# Altium PCB urbanturbine_rev6.PcbDoc
Units mm, origin at the board's own origin, x right, y up, seen from the top; angles counter-clockwise.
Board outline 100 x 100 mm, 2 copper layers (Top Layer, Bottom Layer); 61 components, 55 nets, 234 pads, 58 vias.
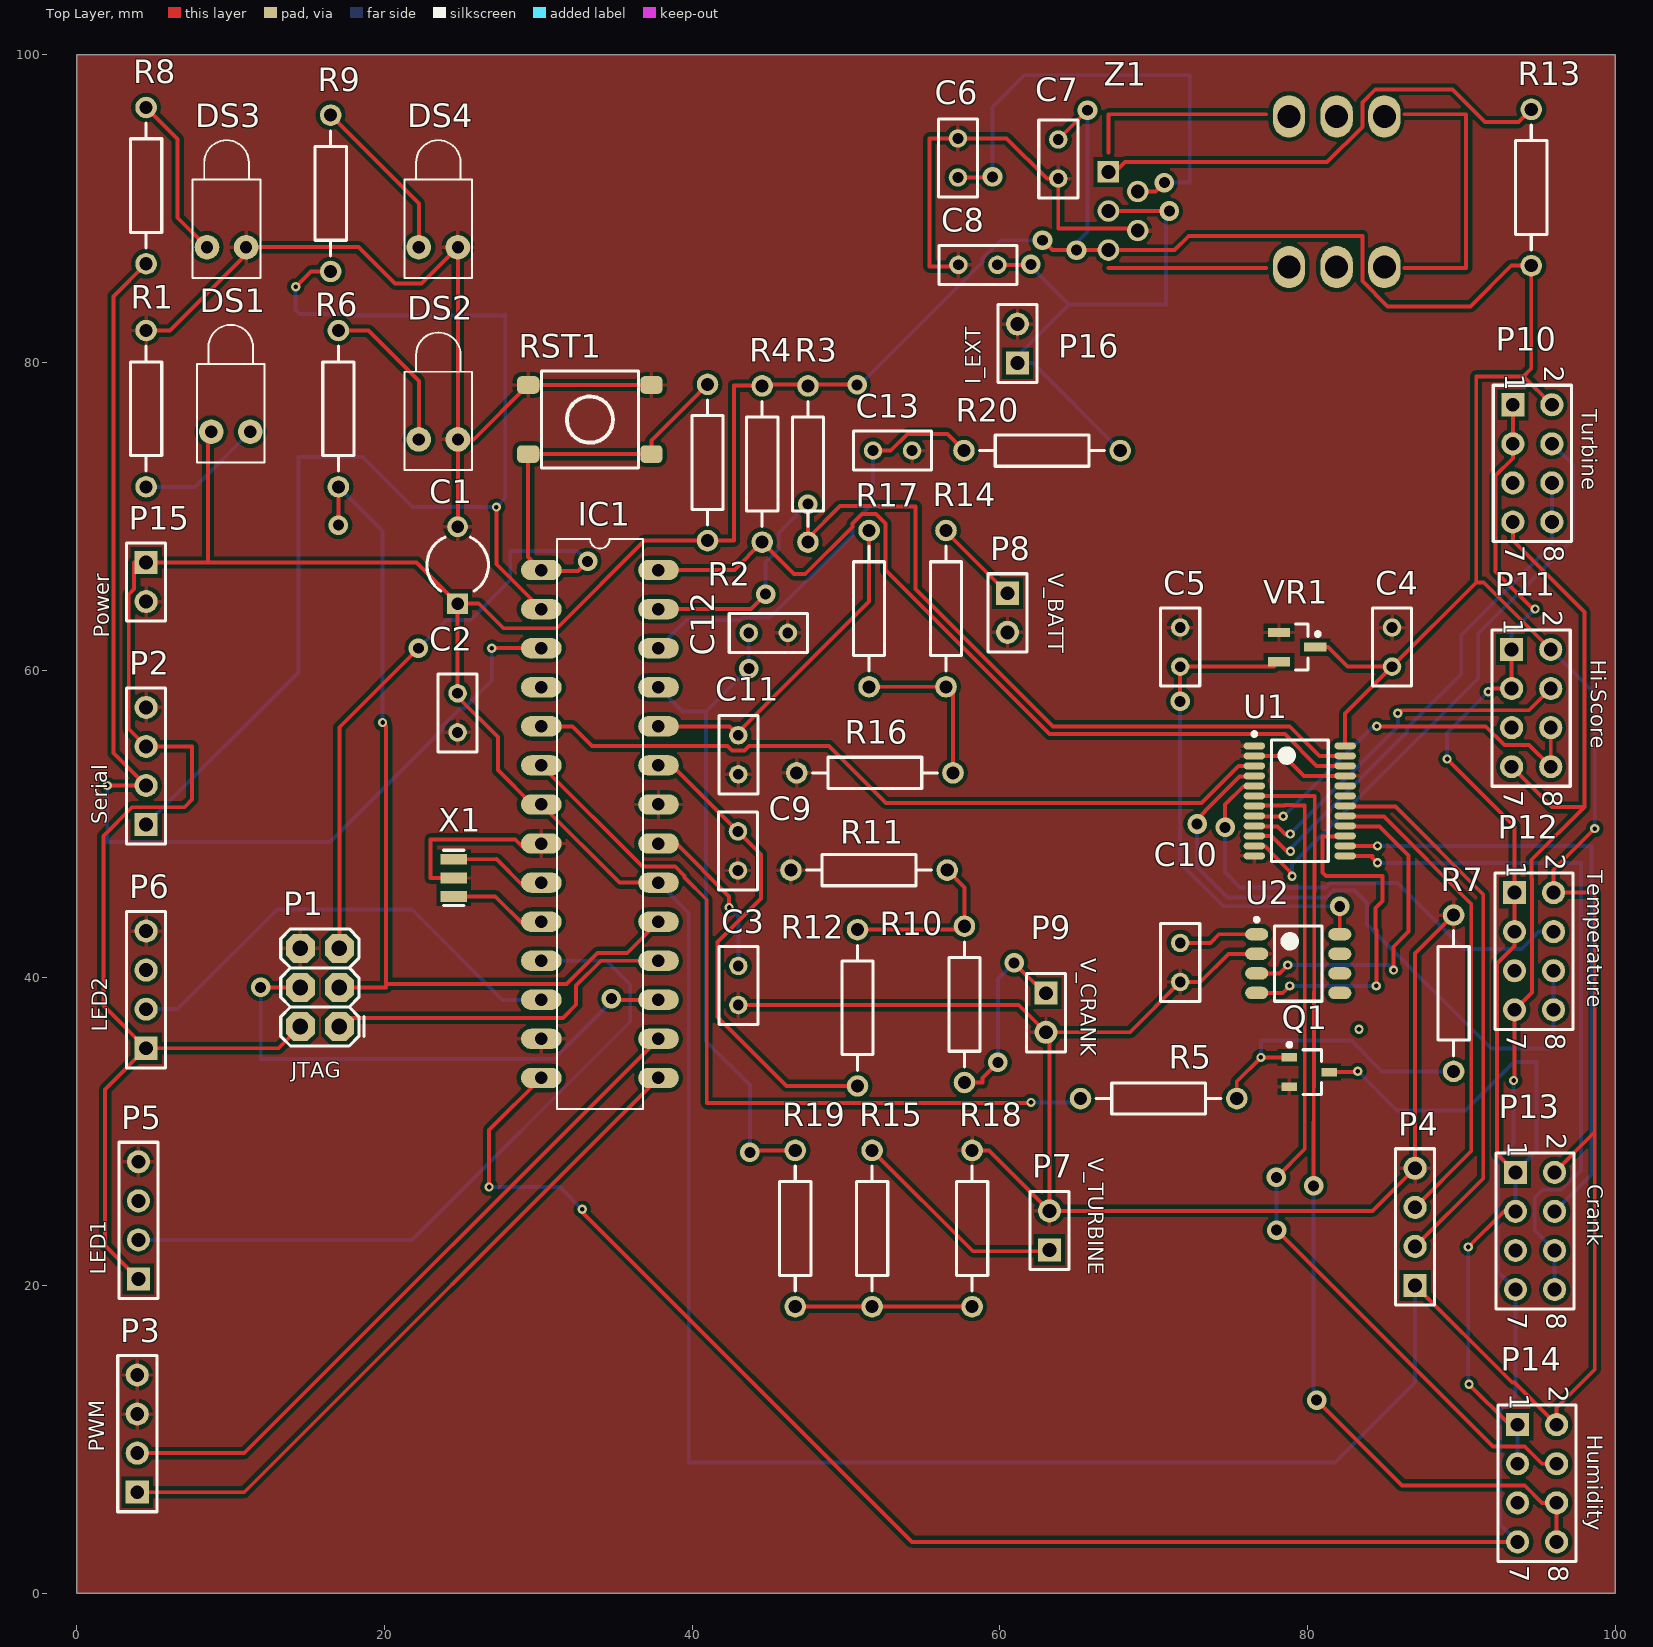
[diagram p0: Top Layer view]
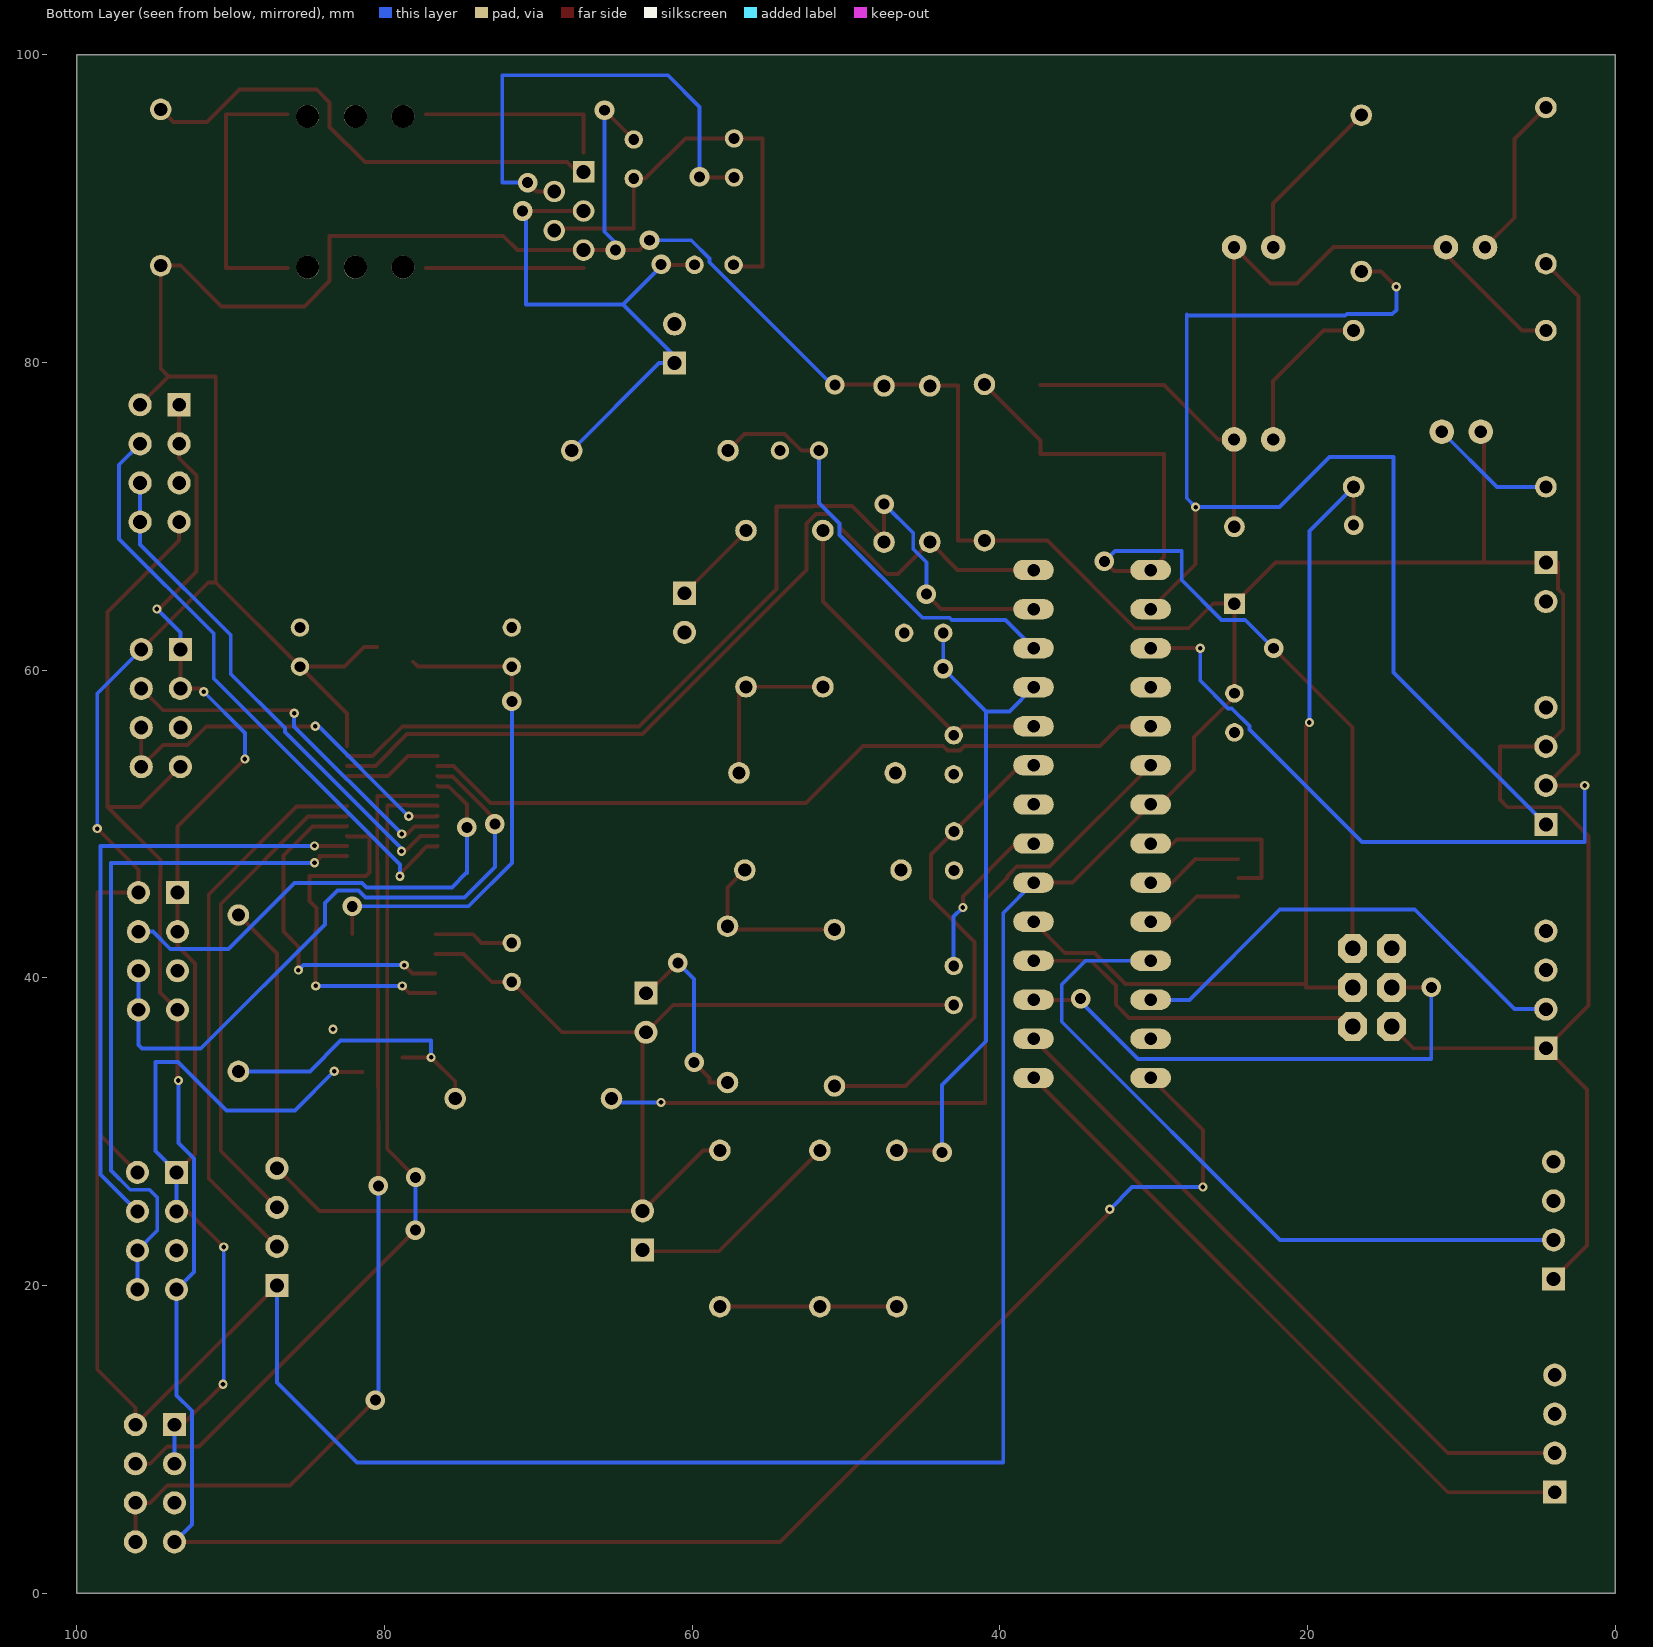
[diagram p1: Bottom Layer view, seen from below]

## Layer stack, top to bottom
Top Solder: solder mask 0.0102, Solder Resist, Dk 3.5
Top Layer: signal copper 0.0356
Dielectric 1: dielectric 0.32, FR-4, Dk 4.8
Bottom Layer: signal copper 0.0356
Bottom Solder: solder mask 0.0102, Solder Resist, Dk 3.5

## Board outline
0,0 0,100 100,100 100,0 0,0

## Design rules (kind name [scope] priority, off if disabled: settings)
Clearance [All] p1: gap=0.254
PolygonConnect [All] p1: connectstyle=Relief reliefconductorwidth=0.254 reliefentries=4 polygonreliefangle="90 Angle" airgapwidth=0.254
RoutingVias [All] p1: holewidth=0.711 width=1.27 viastyle="Through Hole" minholewidth=0.711 minwidth=1.27 maxholewidth=0.711 maxwidth=1.27
SilkToSolderMaskClearance [IsPad] p1: minsilkscreentomaskgap=0.1 clearancetoexposedcopper=TRUE
SolderMaskExpansion [All] p1: expansion=0.102
Width [All] p1: maxlimit=0.254 minlimit=0.254 preferedwidth=0.254
29 further rules are at their usual default settings.

## Classes and differential pairs
component class displays: P10 P11 P12 P13 P14
component class sensors: C6 C7 C8 C9 C10 C11 C12 C13 P7 P8 P9 P16 R10 R11 R12 R13 R14 R15 R16 R17 R18 R19 U2 Z1
component class urbanturbine: C1 C2 C3 C4 C5 DS1 DS2 DS3 DS4 IC1 P1 P2 P3 P4 P5 P6 P15 Q1 R1 R2 R3 R5 R6 R7 R8 R9 RST1 U1 VR1 X1

## Components (designator, comment, footprint, x,y, rotation, side; value= is the part's Value field where it differs from the comment)
C1 "Cap2" CAPR5-4X5 24.75,66.825 r90 top
C2 "0.1uF" RAD-0.1 24.75,57.225 r90 top
C3 "C1005X7R1H104K050BB" RAD-0.1 43,39.5 r270 top
C4 "Cap" RAD-0.1 85.5,61.5 r270 top
C5 "Cap" RAD-0.1 71.725,61.5 r270 top
C6 "Cap" RAD-0.1 57.275,93.3 r90 top
C7 "Cap" RAD-0.1 63.8,93.23 r90 top
C8 "Cap" RAD-0.1 58.575,86.35 r180 top
C9 "Cap" RAD-0.1 42.975,48.25 r90 top
C10 "p" RAD-0.1 71.725,41 r90 top
C11 "Cap" RAD-0.1 43,54.5 r90 top
C12 "Cap" RAD-0.1 44.95,62.425 r180 top
C13 "Cap" RAD-0.1 53.025,74.275 r180 top
DS1 "LTST-C191KGKT" LED-1 10,75.5 r90 top
DS2 "LTST-C191KRKT" LED-1 23.5,75 r90 top
DS3 "LTST-C191KRKT" LED-1 9.73,87.5 r90 top
DS4 "LTST-C191KRKT" LED-1 23.5,87.5 r90 top
IC1 "ATMEGA328-PU" *DIL28 34,50 r0 top
P1 "M20-9980346" 2X3 17.065,36.835 r90 top
P2 "Header 4" HDR1X4 4.5,49.96 r90 top
P3 "" HDR1X4 3.925,6.56 r90 top
P4 "" HDR1X4 87,20 r90 top
P5 "" HDR1X4 4,20.42 r90 top
P6 "" HDR1X4 4.5,35.42 r90 top
P7 "" HDR1X2 63.225,22.31 r90 top
P8 "" HDR1X2 60.5,65 r270 top
P9 "" HDR1X2 63,39 r270 top
P10 "" HDR2X4 93.35,77.255 r270 top
P11 "SPEED_DISP" HDR2X4 93.275,61.345 r270 top
P12 "TEMP_DISP" HDR2X4 93.46,45.54 r270 top
P13 "CRANK_DISP" HDR2X4 93.525,27.355 r270 top
P14 "HUMIDITY_DISP" HDR2X4 93.66,10.95 r270 top
P15 "" HDR1X2 4.5,67 r270 top
P16 "" HDR1X2 61.15,79.96 r90 top
Q1 "MOSFET N" SOT23127P600-8N 80.125,33.875 r0 top
R1 "RC0603JR-071KL" AXIAL-0.4 4.5,77 r90 top
R2 "Res1" AXIAL-0.4 41,73.5 r90 top
R3 "Res2" AXIAL-0.4 47.525,73.4 r90 top
R4 "Res2" AXIAL-0.4 44.55,73.4 r90 top
R5 "ERJ-3EKF1002V" AXIAL-0.4 70.325,32.15 r180 top
R6 "Res1" AXIAL-0.4 17,77 r90 top
R7 "Res2" AXIAL-0.4 89.5,39 r90 top
R8 "Res1" AXIAL-0.4 4.5,91.5 r90 top
R9 "Res1" AXIAL-0.4 16.5,91 r90 top
R10 "Res2" AXIAL-0.4 57.7,38.275 r270 top
R11 "Res2" AXIAL-0.4 51.5,47 r180 top
R12 "Res2" AXIAL-0.4 50.75,38.05 r90 top
R13 "Res2" AXIAL-0.4 94.55,91.375 r270 top
R14 "Res2" AXIAL-0.4 56.5,64 r90 top
R15 "Res2" AXIAL-0.4 51.7,23.7 r90 top
R16 "Res2" AXIAL-0.4 51.875,53.325 r180 top
R17 "Res2" AXIAL-0.4 51.5,64 r270 top
R18 "Res2" AXIAL-0.4 58.2,23.7 r90 top
R19 "Res2" AXIAL-0.4 46.7,23.7 r270 top
R20 "Res2" AXIAL-0.4 62.75,74.275 r0 top
RST1 "PTS645SH50SMTR92 LFS" "TACTILE SWITCH SMD" 33.35,76.29 r180 top
U1 "TCA9548A" TCA9548A 79.5,51.5 r0 top
U2 "HIH6030" HIH6300 79.4,40.925 r0 top
VR1 "AP2138N-3.3TRG1" SOT23_M 79.325,61.5 r0 top
X1 "16MHz" RESONATOR-SMD 24.5,46.5 r90 top
Z1 "LEM HO-25P" HO-25 67.06,93.64 r0 top

## Footprints (in the part's own frame and the unit in brackets; to place one, negate y for a bottom-side part, rotate by r counter-clockwise, add the part's x,y. Pads: shape width x height; smd on the part's side, far side on the other; paste and mask are expansions set on the pad)
2X3 [mil] "2X3"
  oct 74x74 hole 40: 1(0,0) 2(0,100) 3(100,0) 4(100,100) 5(200,0) 6(200,100)
  silkscreen extent -50,-63 250,150, body extent -50,-49 250,149, height 335
*DIL28 [mil]
  oval 104x52 hole 32: 1(-150,650) 2(-150,550) 3(-150,450) 4(-150,350) 5(-150,250) 6(-150,150) 7(-150,50) 8(-150,-50) 9(-150,-150) 10(-150,-250) 11(-150,-350) 12(-150,-450) 13(-150,-550) 14(-150,-650) 15(150,-650) 16(150,-550) 17(150,-450) 18(150,-350) 19(150,-250) 20(150,-150) 21(150,-50) 22(150,50) 23(150,150) 24(150,250) 25(150,350) 26(150,450) 27(150,550) 28(150,650)
  silkscreen extent -110,-730 110,730, body extent -315,-730 110,730, height 314
AXIAL-0.4 [mm] "Axial Device, Thru-Hole; 2 Leads; 0.4 in Pin Spacing"
  round 1.4 hole 0.85: 1(-5.08,0) 2(5.08,0)
  silkscreen extent -4.06,-1.02 4.06,1.02
CAPR5-4X5 [mm] "Capacitor; 2 Leads"
  rect 1.35x1.35 hole 0.8: 1(-2.5,0)
  round 1.35 hole 0.8: 2(2.5,0)
  silkscreen extent -1.69,-2 1.82,2
HDR1X2 [mm] "Connector; Header; 2 Position"
  rect 1.5x1.5 hole 0.9: 1(0,0)
  round 1.5 hole 0.9: 2(2.54,0)
  silkscreen extent -1.27,-1.27 3.81,1.27
HDR1X4 [mm] "Connector; Header; 4 Position"
  rect 1.5x1.5 hole 0.9: 1(0,0)
  round 1.5 hole 0.9: 2(2.54,0) 3(5.08,0) 4(7.62,0)
  silkscreen extent -1.27,-1.27 8.89,1.27
HDR2X4 [mm] "Connector; Header; 4x2 Position"
  rect 1.5x1.5 hole 0.9: 1(0,0)
  round 1.5 hole 0.9: 2(0,2.54) 3(2.54,0) 4(2.54,2.54) 5(5.08,0) 6(5.08,2.54) 7(7.62,0) 8(7.62,2.54)
  silkscreen extent -1.27,-1.27 8.89,3.81
HIH6300 [mm] "Temp/Humidity sensor"
  oval 1.5x0.8 smd: 1(-2.7,1.905) 2(-2.7,0.635) 3(-2.7,-0.635) 4(-2.7,-1.905) 5(2.7,-1.905) 6(2.7,-0.635) 7(2.7,0.635) 8(2.7,1.905)
  silkscreen extent -2.82,-2.45 1.55,2.98, body extent -1.95,-2.45 1.95,2.45, height 1.91
HO-25 [mm]
  round 1.4 / inner oval 2.5x1.4 / far side round 1.4 hole 0.9: 1(0,-6.33) 2(1.905,-5.06) 3(0,-3.79) 4(1.905,-2.52)
  rect 1.4x1.4 / inner rect 2.5x1.4 / far side rect 1.4x1.4 hole 0.9: 5(0,-1.25)
  oval 2.1x2.74 / inner round 1.5 / far side round 1.5 hole 1.5: ""(11.74,-7.44) ""(11.74,2.36) ""(14.84,-7.44) ""(14.84,2.36) ""(17.94,-7.44) ""(17.94,2.36)
  Top Layer lines w0.254: 0,-7.5 10.25,-7.5 ; 0,0 0,2.5 10.25,2.5 ; 19.25,-7.5 23.25,-7.5 23.25,2.5 19.25,2.5
  body extent -0.22,-8.5 23.72,3.5, height 20.8
LED-1 [mm] "LED; 2 Leads"
  round 1.6 hole 0.8: 1(0,1.27) 2(0,-1.27)
  silkscreen extent -2,-2.2 6.95,2.2
RAD-0.1 [mm] "Radial Cap, Thru-Hole; 2 Leads; 0.1 in Pin Spacing"
  round 1.2 hole 0.7: 1(-1.27,0) 2(1.27,0)
  silkscreen extent -2.54,-1.27 2.54,1.27
RESONATOR-SMD [mil] "RESONATOR-SMD"
  rect 28x67 smd: 1(-47.62,0) 2(-0.38,0) 3(47.62,0)
  silkscreen extent -71,-26 71,26
SOT23_M [mm] "SOT23, 3-Leads, Body 2.9x1.3mm, Pitch 0.95mm, Lead Span 2.3mm - Reverse Pinning, IPC Low Density"
  rect 1.45x0.6 smd: 1(1.175,0) 2(-1.175,-0.95) 3(-1.175,0.95)
  silkscreen extent -0.1,-1.5 1.48,1.5, body extent -0.7,-1.5 0.7,1.5, height 1.1
SOT23127P600-8N [mm]
  rect 1x0.55 smd: 1(-1.3,0.95) 2(-1.3,-0.95) 3(1.3,0)
  silkscreen extent -1.42,-1.45 0.8,1.9, body extent -0.8,-1.45 0.8,1.45, height 1.25
"TACTILE SWITCH SMD" [mm] "Switch, Through-Hole, 4 Leads, Body 8.5x8.5mm, Row Spacing 9.0mm, Pitch 4.5mm"
  rrect50% 1.448x1.143 smd: 1(4.01,-2.25) 2(-4,-2.25) 3(4.01,2.24) 4(-4,2.24)
  silkscreen extent -3.16,-3.16 3.15,3.15, body extent -4.5,-3.1 4.5,3.1, height 4.5
TCA9548A [mm] "TSOP, 24-Leads, Body 7.80x4.40mm, Pitch 0.65mm, IPC Medium Density"
  oval 1.4x0.45 smd: 1(-2.95,3.575) 2(-2.95,2.925) 3(-2.95,2.275) 4(-2.95,1.625) 5(-2.95,0.975) 6(-2.95,0.325) 7(-2.95,-0.325) 8(-2.95,-0.975) 9(-2.95,-1.625) 10(-2.95,-2.275) 11(-2.95,-2.925) 12(-2.95,-3.575) 13(2.95,-3.575) 14(2.95,-2.925) 15(2.95,-2.275) 16(2.95,-1.625) 17(2.95,-0.975) 18(2.95,-0.325) 19(2.95,0.325) 20(2.95,0.975) 21(2.95,1.625) 22(2.95,2.275) 23(2.95,2.925) 24(2.95,3.575)
  silkscreen extent -3.07,-3.95 1.85,4.47, body extent -3.27,-3.96 3.28,3.93, height 1.2

## Part data
C1 C4 C5 C6 C7 C8 C9 C11 C12 C13: "Capacitor"
C2 C3 C10: library part Cap, "Capacitor"
DS1 DS2 DS3 DS4: library part LED1, "Typical RED GaAs LED"
IC1: "IC MCU 8BIT 32KB FLASH 28DIP"
P1: "DIL VERTICAL PC TAIL PIN HEADER"
P2: "Header, 4-Pin"
P3 P4 P5 P6: library part "Header 4", "Header, 4-Pin"
P7 P8 P9 P15 P16: library part "Header 2", "Header, 2-Pin"
P10 P11 P12 P13 P14: library part "Header 4X2", "Header, 4-Pin, Dual row"
Q1: "N-channel MOSFET"
R1 R2 R5 R6 R8 R9: library part Res2, "Resistor"
R3 R4 R7 R10 R11 R12 R13 R14 R15 R16 R17 R18 R19 R20: "Resistor"
RST1: "SWITCH TACTILE SPST-NO 0.05A 12V"
U1: "IIC multiplexor"
U2: "Temp/Humidity Sensor"
VR1: "IC REG LINEAR 3.3V 250MA SOT23-3"
X1: library part CSTNE16M0VH3C000R0, "CER RESONATOR 16MHZ SMD"
Z1: "Hall Effect Current Sensor"

## Via types
v1: diameter 0.6, hole 0.3, Top Layer to Bottom Layer, 31 vias
v2: diameter 1.27, hole 0.711, Top Layer to Bottom Layer, 26 vias
v3: diameter 1.27, hole 0.711, Top Layer to Bottom Layer, tented both sides, 1 vias

## Nets (pads, with @x,y where several pads share a name; then routed paths per layer and width w, separated by ;. In a path a pad name is that pad's centre, name@x,y a point inside that pad or via, vN(x,y) a via of type N, cw(c..) or ccw(c..) an arc to the next point about the centre after c; other vN are vias at no path point)
3.3V: C5.2 U2.8 VR1.2 | length 32.7
  Top Layer w0.254: v2(71.725,57.975) C5.2 77.83,60.23 VR1.2 ; U2.8 v2(82.1,44.65)
  Bottom Layer w0.254: v2(71.725,57.975) 71.725,47.475 74.55,44.65 v2(82.1,44.65)
+5: C1.1 C2.2 C4.2 C7.2 DS1.1 IC1.7 IC1.20 P1.2 P2.3 P4.1 P5.1 P6.1 P10.2 P11.2 P12.2 P13.2 P14.2 P15.1 R2.1 R3.2 R4.2 R13.2 U1.24 VR1.1 Z1.1 | length 449.2
  Top Layer w0.254: P5.1 1.83,22.59 1.83,32.75 P6.1 ; DS1.1 8.525,75.295 8.525,67 ; P1.2 13.11,35.42 P6.1 ; IC1.20 35.27,46.19 IC1.7 29.605,51.27 27.375,53.5 27.375,55.65 24.75,58.275 C2.2 C1.1 ; v2(50.725,78.55) 50.695,78.58 44.5,78.58 44.425,78.505 42.72,78.505 42.72,68.42 R2.1 36.895,68.42 31.2,62.725 27.725,62.725 26.125,64.325 C1.1 ; v2(62.775,87.95) 63.415,87.31 v2(64.985,87.31) Z1.1 71.36,87.31 72.281,88.231 83.569,88.231 83.569,85.287 85.206,83.65 90.6,83.65 93.245,86.295 R13.2 94.55,79.6 94.048,79.097 ; C7.2@63.8,94.7 C7.2 v2(65.7,96.4) v2@65.7,96.525 ; VR1.1 81.325,61.5 82.595,60.23 C4.2 ; U1.24 82.45,57.18 C4.2 ; P4.1 93.31,13.69 93.46,13.69 P14.2 96.2,12.05 98.675,14.525 98.675,29.965 ; P11.2 91.458,65.702 90.972,65.702 ; P10.2 94.048,79.097 ; P13.2 98.675,29.965 ; v1(98.675,49.7) 96,47.025 P12.2 98.675,45.54 98.675,29.965 ; P6.1 1.725,38.195 1.725,49.224 3.592,51.091 6.991,51.091 7.49,51.59 7.49,55.04 P2.3 3.369,56.171 3.369,64.928 3.725,65.284 3.725,67 P15.1 8.525,67 ; 8.525,67 22.075,67 C1.1 ; C4.2 90.972,65.702 ; 90.972,65.702 90.972,79.097 94.048,79.097
  Bottom Layer w0.254: IC1.20 39.775,44.225 39.775,8.5 81.8,8.5 87,13.7 P4.1 ; v2(50.725,78.55) 50.892,78.55 58.864,86.522 58.864,86.756 60.058,87.95 v2(62.775,87.95) ; v2(64.985,87.31) 64.985,87.785 65.7,88.5 v2(65.7,96.4) ; P11.2 98.675,58.485 v1(98.675,49.7)
BATTERY_IN_+: P8.1 R14.2 | length 5.7
  Top Layer w0.254: R14.2 56.5,69 P8.1
BATTERY_VOLTAGE: C11.2 IC1.24 R17.1 | length 22.3
  Top Layer w0.254: IC1.24 42.42,56.35 C11.2 43,55.975 51.5,64.475 R17.1
BYTE_ADDR_LED1: IC1.11 P5.2 | length 46.7
  Bottom Layer w0.254: P5.2 21.793,22.96 35.975,37.142 35.975,39.575 34.44,41.11 IC1.11
BYTE_ADDR_LED2: IC1.12 P6.2 | length 30.8
  Bottom Layer w0.254: P6.2 6.535,37.96 13.025,44.45 21.8,44.45 27.68,38.57 IC1.12
CRANK_C: P13.4 U1.14 | length 40.8
  Top Layer w0.254: U1.14 v1(84.55,48.575)
  Bottom Layer w0.254: v1(84.55,48.575) 98.475,48.575 98.475,27.225 P13.4
CRANK_D: P13.6 P13.8 U1.13 | length 46
  Top Layer w0.254: U1.13 84.225,47.925 84.225,47.8 v1(84.55,47.475) v1@84.55,47.6
  Bottom Layer w0.254: v1(84.55,47.475) 97.775,47.475 97.775,27.466 96.533,26.224 95.274,26.224 94.775,25.725 94.775,23.565 P13.6 P13.8
CRANK_IN_+: P9.1 R10.2 | length 13
  Top Layer w0.254: R10.2 58.87,33.195 58.87,33.495 v2(59.875,34.5) ; v2(60.925,40.975) 62.9,39 P9.1 P9.1@63,39.325
  Bottom Layer w0.254: v2(59.875,34.5) 59.875,39.925 v2(60.925,40.975)
CRANK_VOLTAGE: C9.2 IC1.23 R12.1 | length 31.8
  Top Layer w0.254: IC1.23 38.685,53.81 C9.2 44.475,48.02 44.475,45.15 41.65,42.325 41.65,37.45 46.13,32.97 R12.1
DISPLAY_GND: P10.1 P10.3 P11.1 P11.3 P12.1 P12.3 P13.1 P13.3 P14.1 P14.3 Q1.3 | length 103.4
  Top Layer w0.254: Q1.3 83.225,33.875 v1(83.275,33.925) ; v1(89.075,54.225) 93.46,49.84 P12.1 P12.3 93.46,42.059 92.329,40.928 92.329,28.551 P13.1 ; v1(90.45,22.5) 92.765,24.815 P13.3 ; v1(90.5,13.575) 93.125,10.95 P14.1 ; v1(91.75,58.6) 91.955,58.805 P11.3 P11.1 ; P10.1 P10.3 93.35,73.774 92.219,72.643 92.219,66.406 94.65,63.975 v1(94.8,63.975)
  Bottom Layer w0.254: v1(83.275,33.925) 85.825,31.375 90.275,31.375 93.425,34.525 94.9,34.525 94.9,28.73 P13.1 P13.3 ; v1(89.075,54.225) 89.075,55.925 v1(91.75,58.6) ; v1(90.45,22.5) 90.45,13.625 v1(90.5,13.575) ; P11.1 93.275,62.45 v1(94.8,63.975) ; P14.3 P14.1
DISPLAY_RES: IC1.14 P10.7 P11.7 P12.7 P13.7 P14.7 | length 162.7
  Top Layer w0.254: v1(26.8,26.4) 26.8,30.1 IC1.14 ; v1(32.85,24.95) 32.85,24.775 54.295,3.33 P14.7 ; P11.7 95.9,51.1 98,51.1 ; P10.7 93.35,68.425 98,63.775 98,51.1 ; v1(93.4,33.325) 93.46,33.385 P12.7 94.591,39.051 94.591,46.448 94.575,46.464 94.575,47.675 98,51.1
  Bottom Layer w0.254: v1(26.8,26.4) 31.4,26.4 v1(32.85,24.95) ; v1(93.4,33.325) 93.4,29.269 92.394,28.263 92.394,20.866 P13.7 93.525,12.854 92.529,11.858 92.529,4.461 P14.7
DISPLAY_TOGGLE: IC1.6 R5.2 | length 52.1
  Top Layer w0.254: IC1.6 36.769,47.231 38.902,47.231 39.512,46.621 39.512,46.513 40.95,45.075 40.95,31.85 61.975,31.85 v1(62.025,31.9)
  Bottom Layer w0.254: v1(62.025,31.9) 64.995,31.9 R5.2
ENV_C: U1.16 U2.3 | length 22
  Top Layer w0.254: U2.3 78.19,40.29 v1(78.725,40.825) ; U1.16 82.494,49.831 84.694,49.831 86.581,47.944 86.581,42.999 85.6,42.018 v1(85.6,40.5)
  Bottom Layer w0.254: v1(78.725,40.825) 85.275,40.825 v1(85.6,40.5)
ENV_D: U1.15 U2.4 | length 23.1
  Top Layer w0.254: U2.4 78.395,39.02 v1(78.85,39.475) ; U1.15 82.406,49.181 80.983,49.181 80.983,46.85 81.208,46.625 84.875,46.625 84.875,44.984 84.419,44.528 84.419,43.176 84.475,43.12 v1(84.475,39.475)
  Bottom Layer w0.254: v1(78.85,39.475) v1(84.475,39.475)
GND: C1.2 C2.1 C3.2 C4.1 C5.1 C6.2 C7.1 C8.2 C9.1 C10.1 C11.1 C12.1 C13.1 DS2.2 DS3.2 DS4.2 IC1.8 IC1.13 IC1.22 P1.6 P2.4 P3.3 P3.4 P4.4 P5.4 P6.4 P7.2 P8.2 P9.2 P15.2 P16.2 Q1.2 R1.2 R7.2 R11.2 R16.2 R18.2 RST1.1 RST1.2 U1.1 U1.2 U1.12 U1.21 U2.2 VR1.3 X1.2 Z1.2 | length 201.2
  Top Layer w0.254: R1.2 6.045,82.08 11,87.035 DS3.2 18.3,87.5 20.675,85.125 22.395,85.125 DS4.2 DS2.2 ; X1.2@24.5,46.5 23,46.5 23,49 28.5,49 29.04,48.46 IC1.8@31,48.46 ; C1.2 24.77,69.345 DS2.2 ; RST1.2 RST1.1 25.8,75 DS2.2 ; C3.2 61.23,38.23 P9.2 ; C8.2 57.185,86.23 55.42,86.23 55.42,94.57 C6.2 60.445,94.57 63.055,91.96 C7.1 63.8,88.725 68.82,88.725 Z1.2 ; R18.2 59.295,28.78 P7.2 ; U1.2 78.475,54.425 79.775,53.125 U1.21 ; U2.2 74.86,41.56 73.03,39.73 C10.1 68.455,36.46 P9.2 ; R7.2 87,41.58 P4.4 84.23,24.85 P7.2 ; P9.2 63.225,36.235 P7.2
HI_SCORE_C: P11.4 U1.9 | length 23.6
  Top Layer w0.254: U1.9 76.594,49.831 78.051,49.831 78.14,49.742 78.151,49.742 78.568,49.325 ; v1(85.875,57.2) 86.071,57.396 94.406,57.396 P11.4
  Bottom Layer w0.254: v1(78.875,49.35) 85.875,56.35 v1(85.875,57.2)
HI_SCORE_D: P11.6 P11.8 U1.8 | length 25.7
  Top Layer w0.254: U1.8 76.575,50.55 76.625,50.5 v1(78.425,50.5) ; v1(84.5,56.35) 91.591,56.35 92.807,55.134 94.406,55.134 P11.8 P11.6
  Bottom Layer w0.254: v1(78.425,50.5) 84.5,56.575 v1(84.5,56.35)
HUMIDITY_C: P14.4 U1.7 | length 56.2
  Top Layer w0.254: U1.7 76.581,51.206 78.518,51.206 78.543,51.231 79.107,51.231 79.132,51.206 79.825,51.206 79.825,28.875 v2(77.975,27.025) ; v2(78,23.6) 92.059,9.541 94.128,9.541 95.259,8.41 P14.4
  Bottom Layer w0.254: v2(77.975,27.025) 77.975,23.625 v2(78,23.6)
HUMIDITY_D: P14.6 P14.8 U1.6 | length 64.2
  Top Layer w0.254: U1.6 80.475,51.825 v2(80.4,26.475) ; v2(80.6,12.55) 86.149,7.001 94.128,7.001 95.259,5.87 P14.6 P14.8
  Bottom Layer w0.254: v2(80.4,26.475) 80.4,12.75 v2(80.6,12.55)
MISO: IC1.18 P1.1 | length 23.6
  Top Layer w0.254: P1.1 17.065,37.4 31.6,37.4 32.45,38.25 32.45,39.5 34.06,41.11 IC1.18
MOSI: IC1.17 P1.4 | length 34.9
  Top Layer w0.254: v2(11.95,39.375) P1.4 ; v2(34.75,38.65) 34.83,38.57 IC1.17
  Bottom Layer w0.254: v2(11.95,39.375) 11.95,34.725 31.018,34.725 34.75,38.457 v2(34.75,38.65)
MUX_RST: IC1.5 U1.3 | length 49.7
  Top Layer w0.254: IC1.5 32.225,56.35 33.5,55.075 42.308,55.075 42.594,54.789 43.406,54.789 43.692,55.075 48.9,55.075 52.6,51.375 73.113,51.375 75.513,53.775 U1.3
NetC3_1: C3.1 IC1.21 | length 10.8
  Top Layer w0.254: IC1.21 38.97,48.73 42.4,45.3 v1(42.4,44.575)
  Bottom Layer w0.254: v1(42.4,44.575) 43,43.975 C3.1
NetC6_1: C6.1 Z1.4 | length 31.1
  Top Layer w0.254: C6.1 59.48,92.03 v2(59.525,92.075) ; Z1.4 70.12,91.12 v2(70.7,91.7)
  Bottom Layer w0.254: v2(59.525,92.075) 59.525,96.625 61.575,98.675 72.35,98.675 72.35,91.7 v2(70.7,91.7)
NetC10_2: C10.2 U2.1 | length 5.2
  Top Layer w0.254: C10.2 73.695,42.27 74.255,42.83 U2.1
NetDS1_2: DS1.2 R1.1 | length 8.3
  Bottom Layer w0.254: R1.1 7.69,71.92 DS1.2
NetDS2_1: DS2.1 R6.2 | length 10.4
  Top Layer w0.254: R6.2 18.945,82.08 22.23,78.795 DS2.1
NetDS3_1: DS3.1 R8.2 | length 10.7
  Top Layer w0.254: R8.2 6.55,94.53 6.55,89.41 DS3.1
NetDS4_1: DS4.1 R9.2 | length 11
  Top Layer w0.254: R9.2 22.23,90.35 DS4.1
NetIC1_9: IC1.9 X1.3 | length 7.2
  Top Layer w0.254: X1.3 27.271,47.71 27.281,47.719 29.08,45.92 IC1.9@31,45.92
NetIC1_10: IC1.10 X1.1 | length 7.3
  Top Layer w0.254: X1.1 27.19,45.29 27.2,45.3 29.12,43.38 IC1.10@31,43.38
NetQ1_1: Q1.1 R5.1 R7.1 | length 19.6
  Top Layer w0.254: R5.1 75.405,33.255 v1(76.975,34.825) Q1.1
  Bottom Layer w0.254: v1(76.975,34.825) 76.975,35.925 82.85,35.925 84.855,33.92 R7.1
NetR10_1: R10.1 R11.1 R12.2 | length 11.2
  Top Layer w0.254: R12.2 57.475,43.13 R10.1 57.7,45.88 R11.1
NetR13_1: R13.1 Z1.5 | length 31.9
  Top Layer w0.254: Z1.5 67.49,92.39 68.125,93.025 81.269,93.025 83.569,95.325 83.569,96.913 84.407,97.751 89.417,97.751 91.54,95.628 93.723,95.628 R13.1
NetR14_1: R14.1 R16.1 R17.2 | length 10.8
  Top Layer w0.254: R17.2 R14.1 56.955,58.465 R16.1
NetR15_1: R15.1 R18.1 R19.2 | length 11.5
  Top Layer w0.254: R19.2 R15.1 R18.1
PROX_C: P4.2 U1.18 | length 36.1
  Top Layer w0.254: U1.18 82.494,51.131 85.719,51.131 91.425,45.425 91.425,26.965 P4.2
PROX_D: P4.3 U1.17 | length 31.8
  Top Layer w0.254: U1.17 82.494,50.481 84.969,50.481 90.65,44.8 90.65,28.73 P4.3
PWMA_OUT: IC1.15 P3.1 | length 45
  Top Layer w0.254: P3.1 10.88,6.56 IC1.15
PWMB_OUT: IC1.16 P3.2 | length 45
  Top Layer w0.254: P3.2 10.88,9.1 IC1.16
RST: IC1.1 P1.5 R2.2 RST1.3 RST1.4 | length 61.9
  Top Layer w0.254: P1.5 17.065,56.29 v2(22.2,61.425) ; v2(33.2,67.075) 32.575,66.45 30.25,66.45 IC1.1 29.34,67.36 RST1.3 RST1.4 37.35,74.93 R2.2
  Bottom Layer w0.254: v2(22.2,61.425) 24.044,63.269 25.583,63.269 28.175,65.861 28.175,67.75 32.525,67.75 v2(33.2,67.075)
RX: IC1.2 P2.1 R9.1 | length 80.9
  Top Layer w0.254: v1@14.15,84.85 15.22,85.92 R9.1 ; v1(27.275,70.6) 27.275,66.885 IC1.2
  Bottom Layer w0.254: P2.1 14.4,59.86 14.4,73.85 18.575,73.85 21.825,70.6 v1(27.275,70.6) 27.85,71.175 27.85,83.125 27.775,83.05 17.559,83.05 17.448,83.161 14.489,83.161 14.225,83.425 v1(14.225,84.925)
SCK: IC1.19 P1.3 R6.1 | length 58.7
  Top Layer w0.254: R6.1 v2(17,69.425) v2@17.05,69.375 ; P1.3 20.1,39.375 ; v1(19.875,56.6) 20.1,56.375 20.1,39.55 20.161,39.611 31.843,39.611 33.85,41.618 35.778,41.618 IC1.19 IC1.19@37.81,43.661
  Bottom Layer w0.254: R6.1 19.875,69.045 v1(19.875,56.6)
SCL: IC1.28 R4.1 U1.22 | length 56.6
  Top Layer w0.254: IC1.28 42.74,66.51 R4.1 46.62,66.25 47.35,66.25 50.419,69.319 50.419,69.528 51.052,70.161 51.948,70.161 52.581,69.528 52.581,66.501 63.24,55.842 78.533,55.842 80.6,53.775 U1.22
SDA: IC1.27 R3.1 U1.23 | length 62.5
  Top Layer w0.254: IC1.27 43.82,63.97 44.775,64.925 v2(44.775,64.95) ; R3.1 R3.1@47.525,68.575 ; v2(47.525,70.8) R3.1@47.525,68.575 ; U1.23 80.775,54.425 78.85,56.35 63.45,56.35 54.525,65.275 54.525,70.65 52.177,70.65 52.158,70.669 49.619,70.669 R3.1@47.525,68.575
  Bottom Layer w0.254: v2(44.775,64.95) 44.775,67.016 45.631,67.872 45.631,68.906 v2(47.525,70.8)
TEMP_C: P12.4 U1.5 | length 31
  Top Layer w0.254: v2(74.65,49.775) 74.65,51.257 75.824,52.431 76.506,52.431 U1.5
  Bottom Layer w0.254: v2(74.65,49.775) 74.65,46.825 74.662,46.837 75.625,45.875 81.17,45.875 81.469,46.174 85.851,46.174 90.156,41.869 93.928,41.869 95.059,43 P12.4
TEMP_D: P12.6 P12.8 U1.4 | length 42.5
  Top Layer w0.254: v2(72.825,50) 72.825,50.3 73.35,50.825 73.35,50.85 75.581,53.081 76.506,53.081 U1.4 ; P12.8@95.775,37.695 P12.8
  Bottom Layer w0.254: v2(72.825,50) 72.825,47.2 74.8,45.225 81.238,45.225 81.679,45.666 83.066,45.666 83.875,44.857 83.875,43.475 91.95,35.4 95.775,35.4 96,35.625 P12.8 P12.6
TURBINE_C: P10.4 U1.11 | length 39.6
  Top Layer w0.254: U1.11 76.594,48.531 77.276,48.531 77.631,48.176 77.631,48.144 78.85,46.925 78.825,46.9 79,46.725 v1(79,46.6)
  Bottom Layer w0.254: v1(79,46.6) 79,47.362 91.1,59.462 91.1,62.375 97.25,68.525 97.25,73.355 P10.4
TURBINE_CURRENT: C13.2 IC1.26 R20.1 | length 28.5
  Top Layer w0.254: C13.2 52.908,74.275 53.989,75.356 56.589,75.356 R20.1
  Bottom Layer w0.254: IC1.26 39.63,63.25 43.118,63.25 43.274,63.406 45.031,63.406 50.419,68.794 50.419,69.528 51.755,70.864 C13.2
TURBINE_D: P10.6 P10.8 U1.10 | length 33.8
  Top Layer w0.254: U1.10 77.675,49.225 78.675,48.225 v1(78.9,48.225)
  Bottom Layer w0.254: v1(78.9,48.225) 78.9,48.412 86.481,55.993 86.481,56.231 90,59.75 90,62.275 95.89,68.165 P10.8 P10.6
TURBINE_I_IN: C8.1 P16.1 R20.2 Z1.3 | length 37
  Top Layer w0.254: C8.1@60.1,86.605 C8.1 62,86.35 v3(62.025,86.375) ; Z1.3 v2(71.025,89.85)
  Bottom Layer w0.254: C8.1@59.845,86.233 C8.1 ; v3(62.025,86.375) 62.025,86.25 64.5,83.775 ; R20.2 62.145,79.96 P16.1 61.15,80.425 64.5,83.775 ; v2(71.025,89.85) 70.8,89.625 70.8,83.775 64.5,83.775
TURBINE_IN_+: P7.1 R15.2 | length 14.3
  Top Layer w0.254: R15.2 58.255,22.225 63.14,22.225 P7.1
TURBINE_VOLTAGE: C12.2 IC1.25 R19.1 | length 42.8
  Top Layer w0.254: v2(43.75,28.65) 43.88,28.78 R19.1
  Bottom Layer w0.254: IC1.25 39.375,57.325 40.9,57.325 ; C12.2 v2(43.68,60.105) 40.9,57.325 ; v2(43.75,28.65) 43.75,33.025 40.9,35.875 40.9,57.325
TX: IC1.3 P2.2 R8.1 | length 76.7
  Top Layer w0.254: v1(1.975,52.5) P2.2 2.38,54.62 2.38,84.3 R8.1 ; v1@26.95,61.45 v1(26.97,61.43) IC1.3
  Bottom Layer w0.254: v1(1.975,52.5) 1.975,48.85 1.996,48.829 16.454,48.829 23.769,56.144 23.769,56.361 24.922,57.514 25.156,57.514 26.97,59.328 v1(26.97,61.43)
pads on no net: IC1.4 P5.3 P6.3 P10.5 P11.5 P12.5 P13.5 P14.5 U1.19 U1.20 U2.5 U2.6 U2.7 Z1.
copper on no net:
  other v1: 83.35,36.65

## Polygon pours and split planes (outlines as drawn)
GND on Top Layer "Top Layer-No Net" (solid, pour order 0): -0.025,0 0.025,0.05 0.025,99.95 99.7,99.95 99.75,100 99.775,99.975 99.975,99.975 99.975,0.075 99.925,0.025

## Silkscreen, mask and mechanical layers (free items; w line width, h text height)
Top Overlay:
  text "I_EXT" at 58.775,78.575 h1 r90
  text "Turbine" at 97.825,76.95 h1 r270
  text "V_BATT" at 63.15,66.3 h1 r270
  text "Power" at 2.1,62.1 h1 r90
  text "Hi-Score" at 98.4,60.675 h1 r270
  text "Serial" at 1.975,49.975 h1 r90
  text "Temperature" at 98.175,47 h1 r270
  text "V_CRANK" at 65.25,41.275 h1 r270
  text "LED2" at 1.975,36.5 h1 r90
  text "JTAG" at 13.925,33.5 h1
  text "V_TURBINE" at 65.75,28.3 h1 r270
  text "Crank" at 98.2,26.575 h1 r270
  text "LED1" at 1.875,20.7 h1 r90
  text "Humidity" at 98.2,10.3 h1 r270
  text "PWM" at 1.775,9.175 h1 r90

## Text inside footprints (layer, text, board x,y; h text height)
P10: Top Overlay "8" at 95.382,68.111 h1.27 r270; Top Overlay "7" at 92.842,68.111 h1.27 r270; Top Overlay "1" at 92.842,79.287 h1.27 r270; Top Overlay "2" at 95.382,79.795 h1.27 r270
P11: Top Overlay "8" at 95.307,52.201 h1.27 r270; Top Overlay "7" at 92.767,52.201 h1.27 r270; Top Overlay "1" at 92.767,63.377 h1.27 r270; Top Overlay "2" at 95.307,63.885 h1.27 r270
P12: Top Overlay "8" at 95.492,36.396 h1.27 r270; Top Overlay "7" at 92.952,36.396 h1.27 r270; Top Overlay "1" at 92.952,47.572 h1.27 r270; Top Overlay "2" at 95.492,48.08 h1.27 r270
P13: Top Overlay "8" at 95.557,18.211 h1.27 r270; Top Overlay "7" at 93.017,18.211 h1.27 r270; Top Overlay "1" at 93.017,29.387 h1.27 r270; Top Overlay "2" at 95.557,29.895 h1.27 r270
P14: Top Overlay "8" at 95.692,1.806 h1.27 r270; Top Overlay "7" at 93.152,1.806 h1.27 r270; Top Overlay "1" at 93.152,12.982 h1.27 r270; Top Overlay "2" at 95.692,13.49 h1.27 r270